# Altium PCB ShutdownDPDT-P01-V02.PcbDoc
Units mil, origin at the board's own origin, x right, y up, seen from the top; angles counter-clockwise.
Board outline 2150 x 2150 mil, 2 copper layers (Top Layer, Bottom Layer); 29 components, 25 nets, 134 pads, 7 vias.
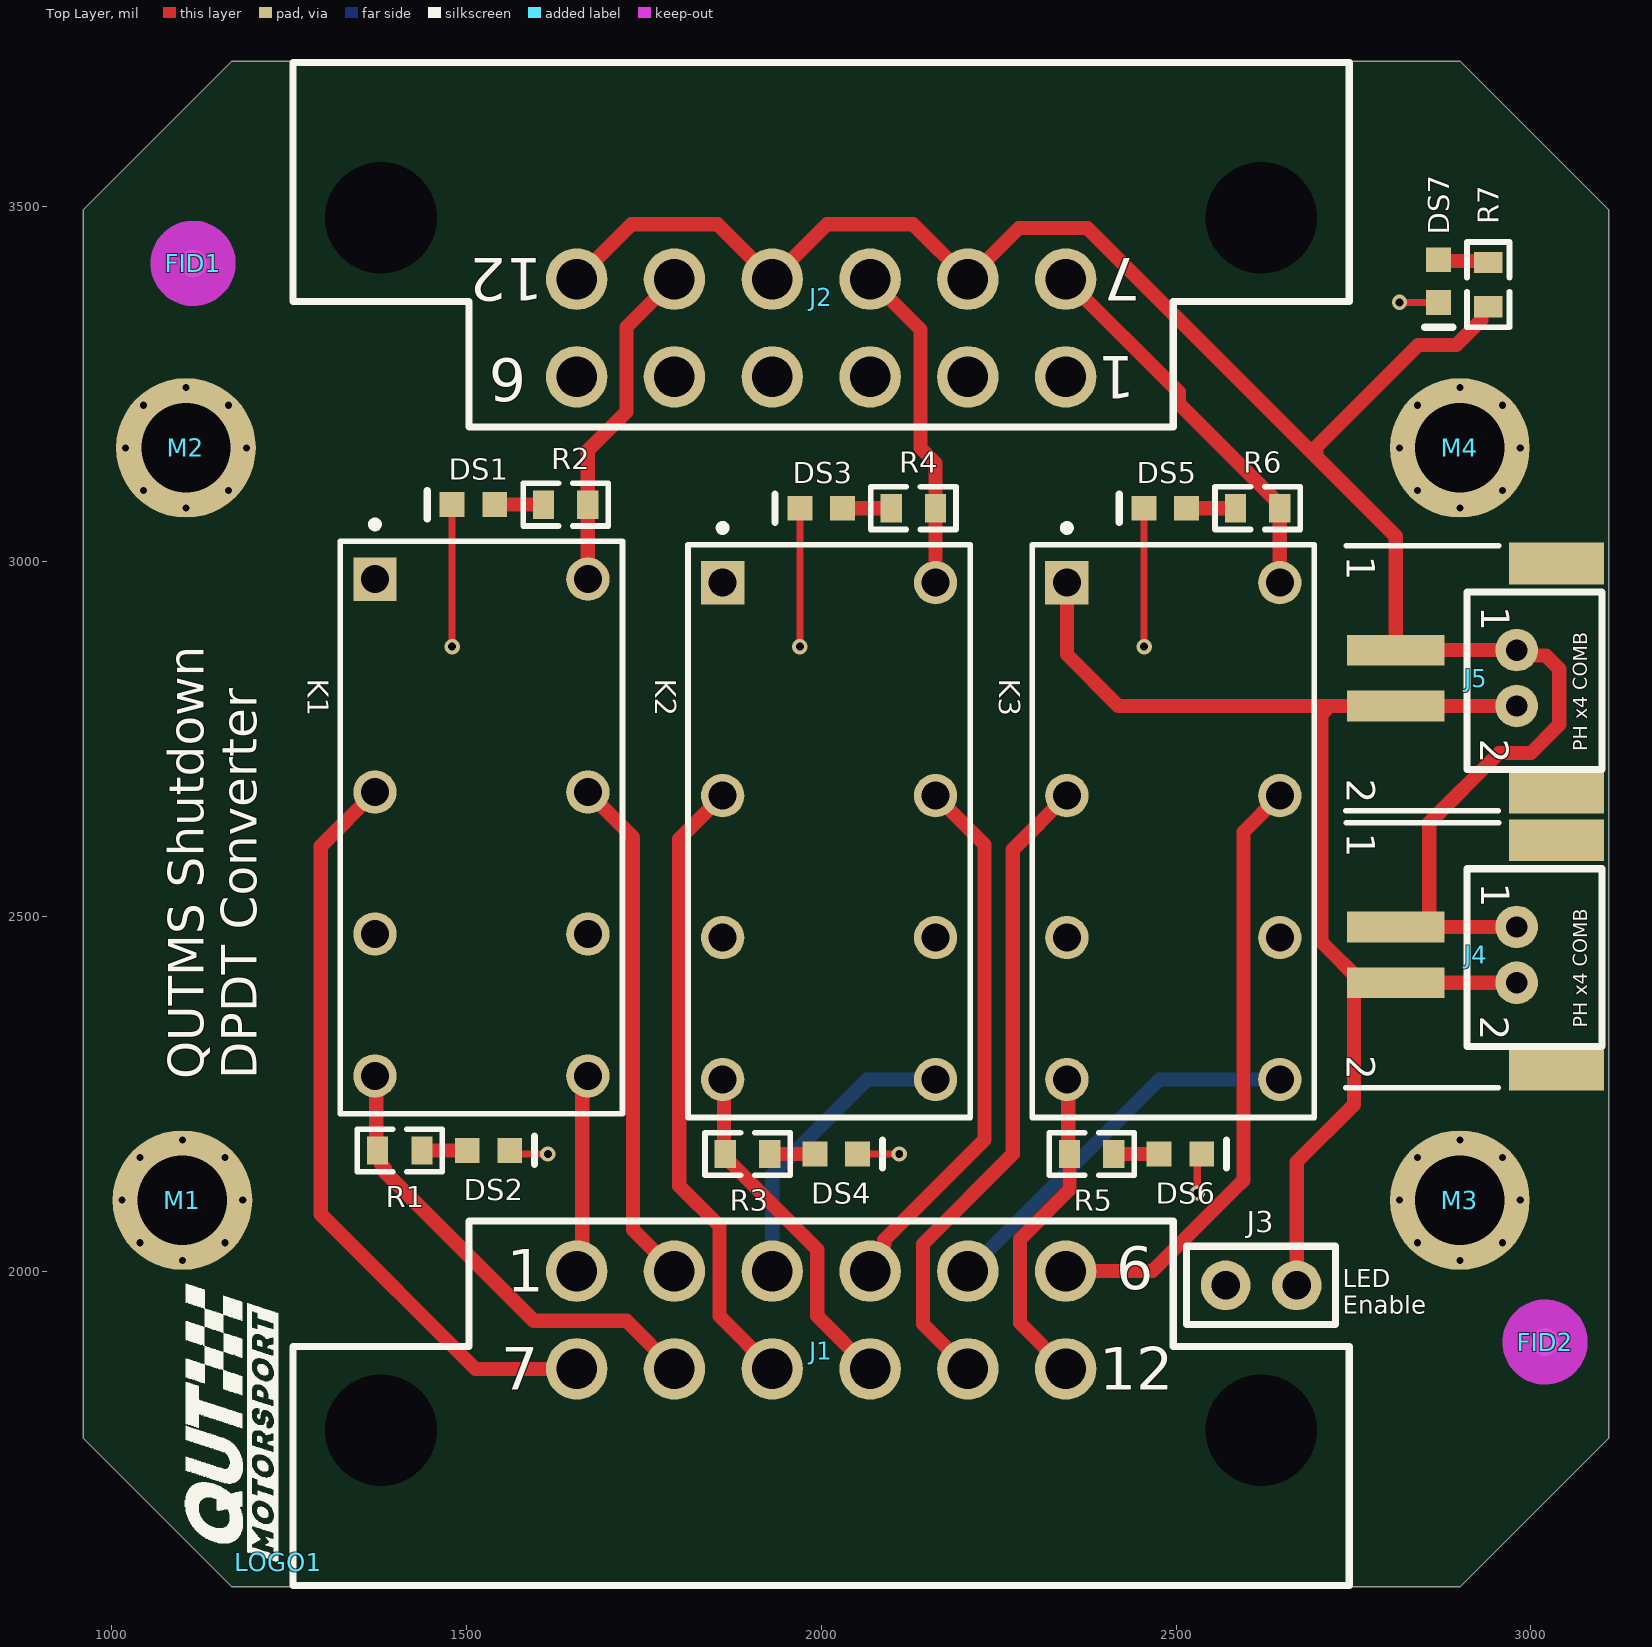
[diagram p0: Top Layer view]
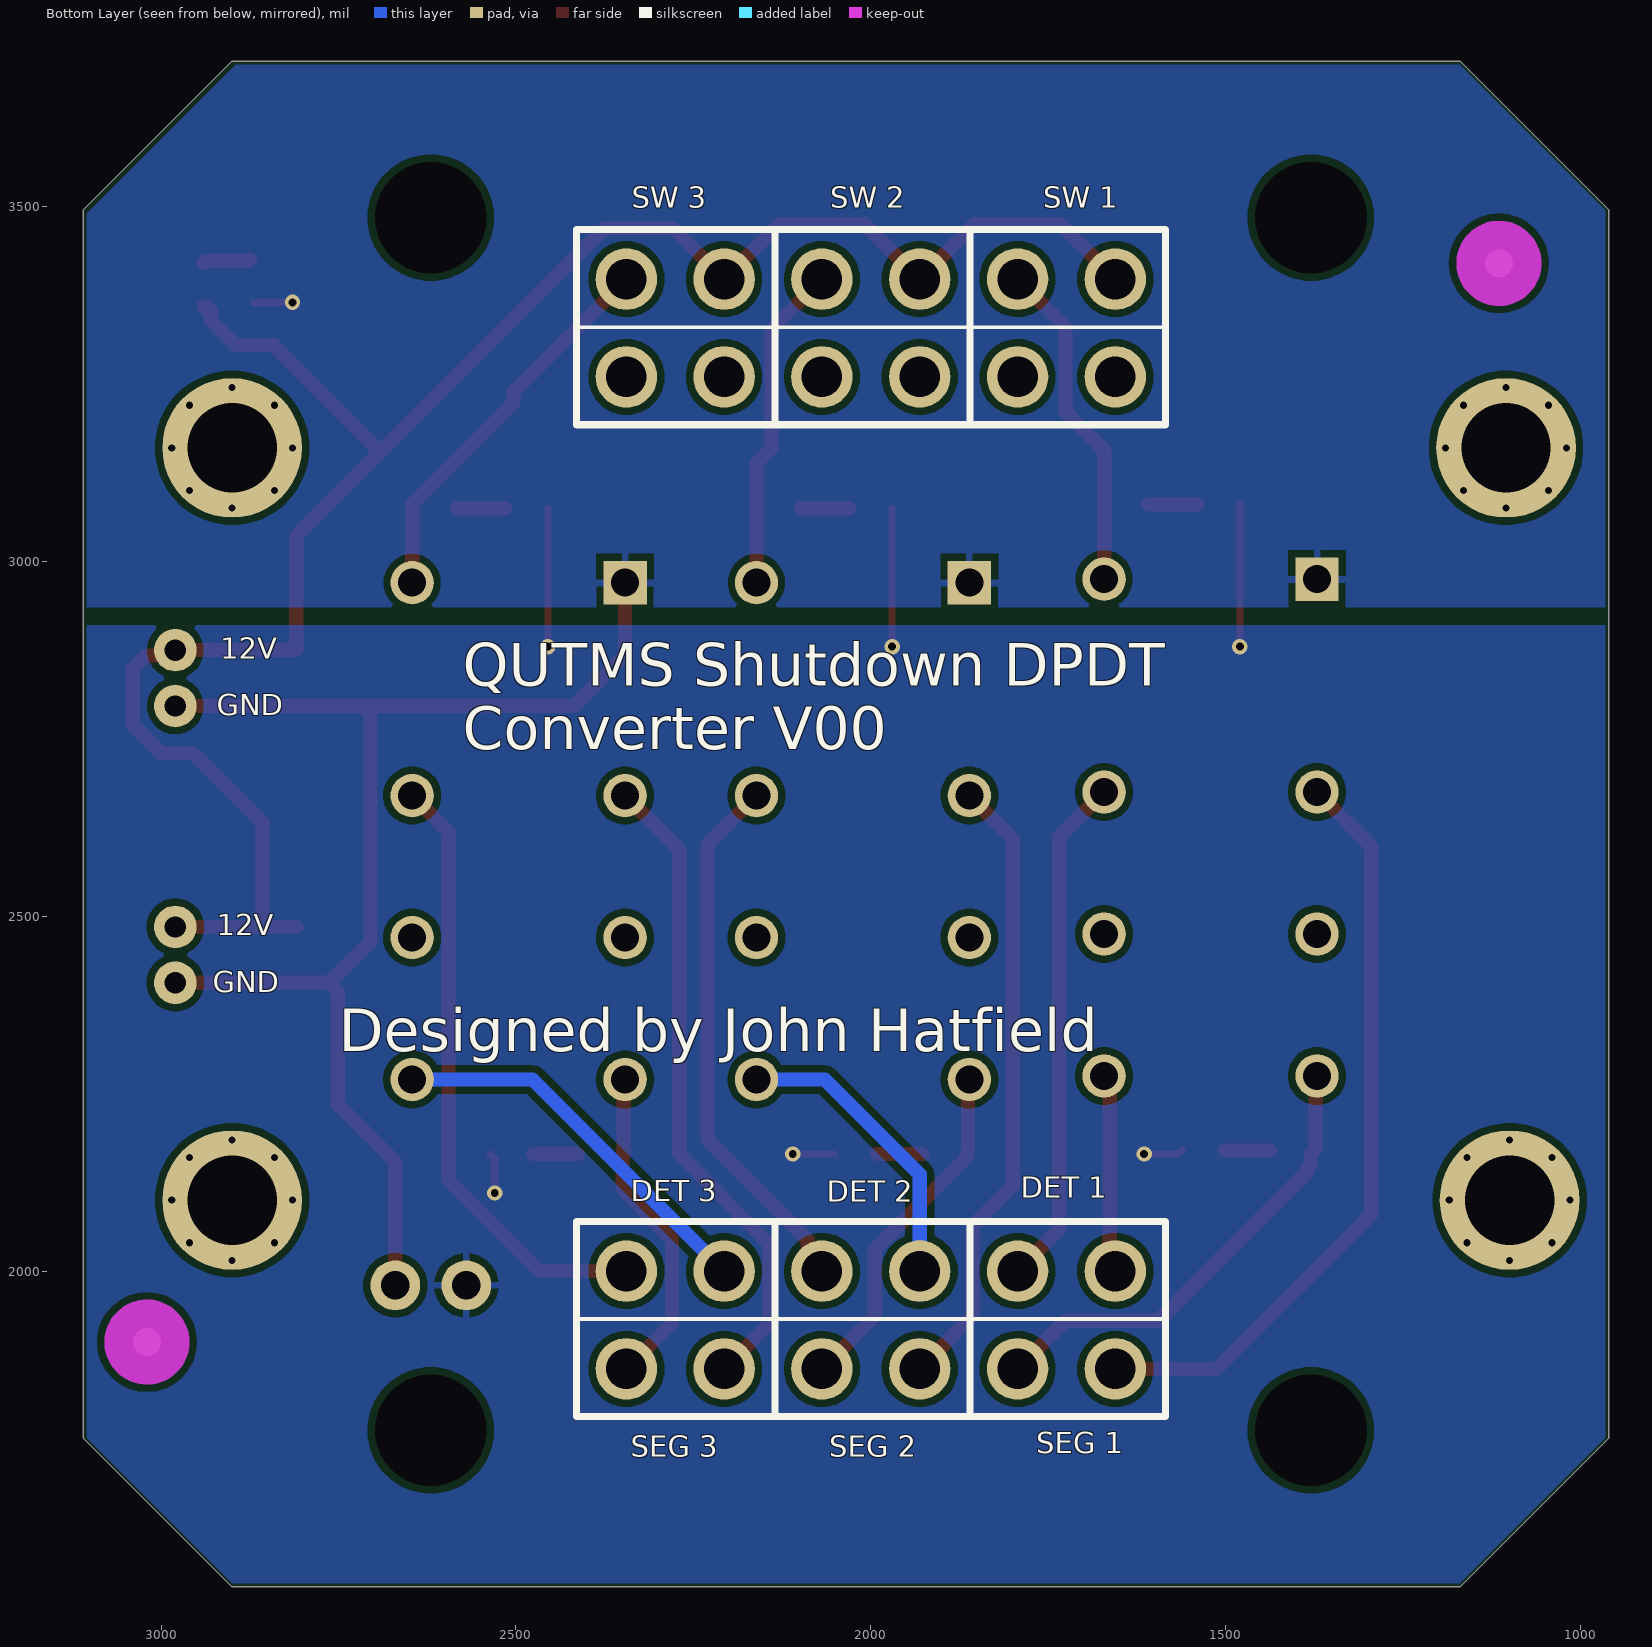
[diagram p1: Bottom Layer view, seen from below]

## Layer stack, top to bottom
Top Solder: solder mask 0.4, Solder Resist, Dk 3.5
Top Layer: signal copper 1.4
Dielectric 1: dielectric 12.6, FR-4, Dk 4.8
Bottom Layer: signal copper 1.4
Bottom Solder: solder mask 0.4, Solder Resist, Dk 3.5

## Board outline
960,1765 960,3495 1170,3705 2900,3705 3110,3495 3110,1765 2900,1555 1170,1555

## Design rules (kind name [scope] priority, off if disabled: settings)
Clearance [All] p1: gap=10 ignorepadtopadclearanceinfootprint=FALSE except(0: Arc-Hole Track-Hole SMDPad-Hole THPad-Hole Via-Hole Fill-Hole Poly-Hole Region-Hole Text-Hole)
PolygonConnect [All] p1: thpad.connectstyle=Relief thpad.reliefconductorwidth=10 thpad.reliefentries=4 thpad.polygonreliefangle="90 Angle" thpad.airgapwidth=10 smdpad.connectstyle=Relief smdpad.reliefconductorwidth=10 smdpad.reliefentries=4 smdpad.polygonreliefangle="90 Angle" smdpad.airgapwidth=10 via.connectstyle=Direct via.reliefconductorwidth=10 via.reliefentries=4 via.polygonreliefangle="90 Angle" via.airgapwidth=10
RoomDefinition DPDT_Relay_11 [InComponentClass('DPDT_Relay_11')] p1: confinementstyle=ConfineIn formatcopy=TRUE lockcomponents=FALSE outline 2235,2075 2710,2075 2710,3180 2235,3180
RoomDefinition ShutdownDPDT-S01-V00 [InComponentClass('ShutdownDPDT-S01-V00')] p2 off: confinementstyle=ConfineIn formatcopy=TRUE lockcomponents=FALSE outline 3214.57,2043.74 3214.57,3370 2744.57,3370 2744.57,2043.74
RoomDefinition RelayGroup [InComponentClass('RelayGroup')] p3 off: confinementstyle=ConfineIn formatcopy=TRUE lockcomponents=FALSE outline 3905,2210 6650,2210 6650,3800 3905,3800
RoomDefinition DPDT_Relay_12 [InComponentClass('DPDT_Relay_12')] p4: confinementstyle=ConfineIn formatcopy=TRUE lockcomponents=FALSE outline 1260,2080 1735,2080 1735,3185 1260,3185
RoomDefinition DPDT_Relay_2 [InComponentClass('DPDT_Relay_2')] p5: confinementstyle=ConfineIn formatcopy=TRUE lockcomponents=FALSE outline 1750,2075 2225,2075 2225,3180 1750,3180
RoutingVias [All] p1: holewidth=28 width=50 viastyle="Through Hole" minholewidth=28 minwidth=50 maxholewidth=28 maxwidth=50
SolderMaskExpansion [All] p1: expansion=4 istentingtop=FALSE
Width [All] p1: maxlimit=20 minlimit=10 preferedwidth=10 minimp=50.000000 maximp=50.000000 favimp=50.000000
30 further rules are at their usual default settings.

## Classes and differential pairs
channel class ShutdownDPDT-S02-V00-Relay: DPDT_Relay_2 DPDT_Relay_11 DPDT_Relay_12
component class ShutdownDPDT-S01-V00: DS7 FID2 J4 J5 LOGO1 M2 M3 M4 R7
component class RelayGroup: J2 J5
component class DPDT_Relay_12: DS1 DS2 K1 R1 R2
component class DPDT_Relay_11: DS5 DS6 K3 R5 R6
component class DPDT_Relay_2: DS4 DS7 K2 R4 R7

## Components (designator, comment, footprint, x,y, rotation, side; value= is the part's Value field where it differs from the comment)
DS1 "LED Red 0603" "LED RED 0603" 1510,3080 r180 top
DS2 "LED Red 0603" "LED RED 0603" 1531.24,2170 r0 top
DS3 "LED Red 0603" "LED RED 0603" 2000,3075 r180 top (schematic designator DS1)
DS4 "LED Red 0603" "LED RED 0603" 2021.24,2165 r0 top (schematic designator DS2)
DS5 "LED Red 0603" "LED RED 0603" 2485,3075 r180 top (schematic designator DS1)
DS6 "LED Red 0603" "LED RED 0603" 2506.24,2165 r0 top (schematic designator DS2)
DS7 "LED Green 0603" "LED GREEN 0603" 2870,3395 r270 top (schematic designator DS3)
FID1 "Fiducial 1MM" "FIDUCIAL 1MM" 1115,3420 r0 top (schematic designator FID2)
FID2 "Fiducial 1MM" "FIDUCIAL 1MM" 3020,1900 r0 top (schematic designator FID1)
J1 "MX120G" MX120G 2000,2000 r0 top (schematic designator J3)
J2 "MX120G" MX120G 2000,3260 r180 top
J3 "Jumper 2Way Pins" Jumper_2Way_Pin 2670,1980 r0 top (schematic designator J5)
J4 "JST PH 2x RIGHT COMB" "JST PH 2x RIGHT COMB" 3095,2366.89 r270 top
J5 "JST PH 2x RIGHT COMB" "JST PH 2x RIGHT COMB" 3095,2756.89 r270 top (schematic designator J1)
K1 "G5V-2-DC12" FP-G5V-2-DC12-MFG 1521.24,2625 r270 top
K2 "G5V-2-DC12" FP-G5V-2-DC12-MFG 2011.24,2620 r270 top (schematic designator K1)
K3 "G5V-2-DC12" FP-G5V-2-DC12-MFG 2496.24,2620 r270 top (schematic designator K1)
LOGO1 "10mm Wide QUTMS Logo" "QUTMS LOGO 10MM" 1235,1590 r90 top
M1 "Hole M3 Tight Plated" "M3.2 PLATED" 1100,2100 r0 top (schematic designator M4)
M2 "Hole M3 Tight Plated" "M3.2 PLATED" 1105,3160 r0 top
M3 "Hole M3 Tight Plated" "M3.2 PLATED" 2900,2100 r0 top
M4 "Hole M3 Tight Plated" "M3.2 PLATED" 2900,3160 r0 top (schematic designator M1)
R1 "1k 5% 0603" Res_ThinFilm_0603 1406.24,2170 r180 top (schematic designator R2)
R2 "1k 5% 0603" Res_ThinFilm_0603 1640,3080 r0 top (schematic designator R1)
R3 "1k 5% 0603" Res_ThinFilm_0603 1896.24,2165 r180 top (schematic designator R2)
R4 "1k 5% 0603" Res_ThinFilm_0603 2130,3075 r0 top (schematic designator R1)
R5 "1k 5% 0603" Res_ThinFilm_0603 2381.24,2165 r180 top (schematic designator R2)
R6 "1k 5% 0603" Res_ThinFilm_0603 2615,3075 r0 top (schematic designator R1)
R7 "10k 1% 0603" Res_ThinFilm_0603 2940,3390 r270 top (schematic designator R3)

## Footprints (in the part's own frame and the unit in brackets; to place one, negate y for a bottom-side part, rotate by r counter-clockwise, add the part's x,y. Pads: shape width x height; smd on the part's side, far side on the other; paste and mask are expansions set on the pad)
"FIDUCIAL 1MM" [mm]
  round 1 smd mask+1: 1(0,0)
  round 1 smd far side mask+1: 1(0,0)
  Keep-Out Layer circle w1.524: c0,0 r0.762
FP-G5V-2-DC12-MFG [mm]
  rect 1.55x1.55 hole 1 paste-1000 mask+0: 1(-8.89,-3.81)
  round 1.55 hole 1 paste-1000 mask+0: 4(-1.27,-3.81) 6(3.81,-3.81) 8(8.89,-3.81) 9(8.89,3.81) 11(3.81,3.81) 13(-1.27,3.81) 16(-8.89,3.81)
  silkscreen extent -10.97,-5.05 10.25,5.05, body extent -10.35,-5.15 10.35,5.15, height 0.25
"JST PH 2x RIGHT COMB" [mm]
  round 1.524 hole 0.762: 1(-3,-2.921) 2(-1,-2.921)
  rect 1.1x3.5 smd: 1(-3,-7.25) 2(-1,-7.25)
  rect 1.5x3.4 smd: M(-6.1,-1.5) M(2.1,-1.5)
  silkscreen extent -6.73,-9.04 2.75,0.13, body extent -6.17,-8.03 1.97,0.23, height 5.89
Jumper_2Way_Pin [mil]
  round 70 hole 40: 1(-100,0) 2(0,0)
  silkscreen extent -155,-55 55,55, body extent -142,-48 42,47, height 332
"LED GREEN 0603" [mil]
  rect 35x35 smd: 1(-30,0) 2(30,0)
  silkscreen extent 65,-20 65,20, body extent -40,-20 40,20, height 30
"LED RED 0603" [mil]
  rect 35x35 smd: 1(-30,0) 2(30,0)
  silkscreen extent 65,-20 65,20, body extent -40,-20 40,20, height 30
"M3.2 PLATED" [mil]
  round 20 hole 10: 1(-85,0) 1(-60,-60) 1(-60,60) 1(0,-85) 1(0,85) 1(60,-60) 1(60,60) 1(85,0)
  round 196.85 hole 125.98: 1(0,0)
MX120G [mm]
  round 2.2 hole 1.45: 1(-8.75,0) 2(-5.25,0) 3(-1.75,0) 4(1.75,0) 5(5.25,0) 6(8.75,0) 7(-8.75,-3.5) 8(-5.25,-3.5) 9(-1.75,-3.5) 10(1.75,-3.5) 11(5.25,-3.5) 12(8.75,-3.5)
  round 0 hole 4 mask+0.254: NC(-15.75,-5.7) NC(15.75,-5.7)
  silkscreen extent -18.9,-11.25 18.9,1.8, body extent -18.78,-32.1 18.58,0.36, height 24.48
"QUTMS LOGO 10MM" [mil]
  silkscreen extent 0,0 392,131
Res_ThinFilm_0603 [mil]
  rect 30x40 smd: 1(-31.24,0) 2(31.24,0)
  silkscreen extent -60,-30 60,30, body extent -31,-16 32,16, height 18

## Part data
J1 J2: "MX120G with standard connector layout"
J3: library part "Jumper 2Way Vert Pins", "Jumper 2Way Vert Pins"
K1 K2 K3: library part CMP-08823-000082-1, "RELAY GEN PURPOSE DPDT 2A 12VDC", Case/Package=DIP, Coil Current=41.7mA, Coil Power=500mW, Coil Resistance=288R, Coil Voltage (DC)=12V, Contact Current Rating=2A, Manufacturer Series=G5V-2, Max Operating Temperature=65°C, Max Voltage Rating (AC)=125V, Min Operating Temperature=-25°C, Package Quantity=25, Approvals=UL, Coil Type=Non-Latching, Contact Material=Gold, Current Rating=2A, Depth=10.1mm, Height=11.5mm, Lead Free="Lead Free", Length=20.5mm, Max Current Rating=2A, Max Voltage Rating (DC)=125V, Mount="Through Hole", Number of Pins=8, Operate Time=7ms, Packaging=Rail/Tube, Power Consumption=500mW, Power Rating=500mW, Radiation Hardening=No, Reference Standard=UL, Relay Action=MOMENTARY, Relay Function=DPDT, Relay Type="General Purpose", Release Time=3ms, Series=G5V-2, Termination="PC Pin", Throw Configuration=DPDT, Type=Electromechanical, Voltage Rating (AC)=125V, Voltage Rating (DC)=125V, Weight=5g, Width=10.1mm
LOGO1: library part "QUTMS Logo 10mm"
M1 M2 M3 M4: "M3.2 Hole, Plated"
R1 R2 R3 R4 R5 R6: "Resistor, SMD, 1k, 0.1W, 5%, 0603"
R7: "Resistor, SMD, 10k, 0.1W, 1%, 0603"

## Via types
v1: diameter 21.65, hole 11, Top Layer to Bottom Layer, 7 vias

## Nets (pads, with @x,y where several pads share a name; then routed paths per layer and width w, separated by ;. In a path a pad name is that pad's centre, name@x,y a point inside that pad or via, vN(x,y) a via of type N, cw(c..) or ccw(c..) an arc to the next point about the centre after c; other vN are vias at no path point)
12V: J2.8 J2.10 J2.12 J4.1 J5.1 R7.2 | length 2875.9
  Top Layer w20: J2.12 1732.72,3475 1853.9,3475 J2.10 2008.31,3475 2129.49,3475 J2.8 2278.9,3470 2375,3470 2690.62,3154.38 2697.5,3147.5 ; J4.1@2809.57,2485 J4.1@2856.81,2485 ; R7.2 2935,3358.76 2930,3353.76 2930,3340 2895,3305 2841.24,3305 2697.5,3161.26 2697.5,3147.5 ; J4.1@2980,2485 2865,2485 J4.1@2856.81,2485 ; 2697.5,3147.5 2809.57,3035.43 2809.57,2875 2980,2875 2987.65,2867.35 3020.94,2867.35 3040,2848.28 3040,2770 3000,2730 2955,2730 2856.81,2631.81 J4.1@2856.81,2485
DET_IN_1: J1.2 K1.13 | length 725.6
  Top Layer w20: K1.13 1735,2611.24 1735,2058.31 J1.2
DET_IN_2: J1.4 K2.13 | length 765.2
  Top Layer w20: J1.4 2068.9,2018.03 2088.78,2037.91 2088.78,2043.78 2230,2185 2230,2601.24 K2.13
DET_IN_3: J1.6 K3.13 | length 866.7
  Top Layer w20: J1.6 2466.91,2000 2583.28,2116.37 2595,2128.09 2595,2618.76 K3.13
DET_OUT_1: J1.1 K1.9 | length 281.5
  Top Layer w20: J1.1 1663.39,2007.87 1663.39,2267.15 K1.9
DET_OUT_2: J1.3 K2.9 | length 421.7
  Bottom Layer w20: J1.3 1931.1,2136.1 2065,2270 K2.9
DET_OUT_3: J1.5 K3.9 | length 551.4
  Bottom Layer w20: J1.5 2476.69,2270 K3.9
GND: DS7.2 J3.2 J4.2 J5.2 K1.1 K2.1 K3.1 | length 1920.8
  Top Layer w10: v1(2815,3365) DS7.2
  Top Layer w20: K3.1 2346.24,2868.76 2418.74,2796.26 2716.72,2796.26 ; J3.2 2670,2153.73 2750.67,2234.4 2750.67,2394.61 J4.2@2762.32,2406.26 ; J4.2@2980,2406.26 2809.57,2406.26 J4.2@2762.32,2406.26 ; J5.2@2980,2796.26 2809.57,2796.26 2716.72,2796.26 ; 2716.72,2796.26 2705,2784.54 2705,2463.58 J4.2@2762.32,2406.26
"LED GND": DS1.2 DS2.2 DS3.2 DS4.2 DS5.2 DS6.2 J3.1 | length 762.2
  Top Layer w10: v1(1480,2880) DS1.2 ; DS2.2 1566.24,2165 v1(1615,2165) ; v1(1970,2880) DS3.2 ; DS4.2 v1(2110,2165) ; v1(2455,2880) DS5.2 ; v1(2530,2110) 2530,2158.76 DS6.2
NetDS1A_1: DS5.1 R6.1 | length 68.8
  Top Layer w20: DS5.1 R6.1
NetDS1B_1: DS1.1 R2.1 | length 68.8
  Top Layer w20: DS1.1 R2.1
NetDS1C_1: DS3.1 R4.1 | length 68.8
  Top Layer w20: DS3.1 R4.1
NetDS2A_1: DS6.1 R5.1 | length 63.8
  Top Layer w20: R5.1 DS6.1
NetDS2B_1: DS2.1 R1.1 | length 63.8
  Top Layer w20: R1.1 DS2.1
NetDS2C_1: DS4.1 R3.1 | length 63.8
  Top Layer w20: R3.1 DS4.1
NetDS3_1: DS7.1 R7.1 | length 66.6
  Top Layer w20: DS7.1@2875,3425 2876.88,3423.12 2938.12,3423.12 R7.1
NetJ2_7: J2.7 K3.16 R6.2 | length 552.8
  Top Layer w20: J2.7 2503.74,3238.54 2503.74,3222.49 2646.24,3080 R6.2 K3.16
NetJ2_9: J2.9 K2.16 R4.2 | length 466
  Top Layer w20: J2.9 2140,3326.69 2140,3160 2161.24,3138.76 R4.2 K2.16
NetJ2_11: J2.11 K1.16 R2.2 | length 473.4
  Top Layer w20: K1.16 R2.2 1671.24,3156.24 1725.9,3210.9 1725.9,3330.39 J2.11
SHDN_IN_1: J1.8 K1.8 R1.2 | length 664.1
  Top Layer w20: K1.8 1373.12,2273.12 1373.12,2171.88 R1.2 1380,2165 1380,2150 1385,2145 1385,2140 1595,1930 1725.51,1930 J1.8
SHDN_IN_2: J1.10 K2.8 R3.2 | length 493.8
  Top Layer w20: K2.8 1863.12,2268.12 1863.12,2166.88 R3.2 1865,2160 1994.41,2030.59 1994.41,1936.69 J1.10
SHDN_IN_3: J1.12 K3.8 R5.2 | length 465.1
  Top Layer w20: J1.12 2280,1926.69 2280,2045 2350,2115 R5.2 2348.12,2166.88 2348.12,2268.12 K3.8
SHDN_OUT_1: J1.7 K1.4 | length 1077.3
  Top Layer w20: K1.4 1295,2598.76 1295,2080 1512.8,1862.2 J1.7
SHDN_OUT_2: J1.9 K2.4 | length 887.5
  Top Layer w20: K2.4 1800,2608.76 1800,2120 1856.61,2063.39 1856.61,1936.69 J1.9
SHDN_OUT_3: J1.11 K3.4 | length 918
  Top Layer w20: J1.11 2143.39,1925.51 2143.39,2038.39 2270,2165 2270,2593.76 K3.4
pads on no net: FID1.1 FID2.1 J1.NC J2.1 J2.2 J2.3 J2.4 J2.5 J2.6 J2.NC J4.M J5.M K1.6 K1.11 K2.6 K2.11 K3.6 K3.11 M1.1 M2.1 M3.1 M4.1

## Polygon pours and split planes (outlines as drawn)
GND on Bottom Layer "GNDP" (solid, pour order 1): 965,3495 1170,3700 2895,3700 3105,3490 3105,2925 965,2925
"LED GND" on Bottom Layer "GNDP" (solid, pour order 0): 965,2910 3105,2910 3105,1765 2900,1560 1170,1560 965,1765

## Silkscreen, mask and mechanical layers (free items; w line width, h text height)
Top Overlay:
  text "QUTMS Shutdown / DPDT Converter" at 1205,2270 h50 r90
  text "LED / Enable" at 2735,1940 h25
Bottom Overlay:
  lines w5: 1585,1932.5 2415,1932.5 ; 1585,3330 2415,3330
  lines w10: 1860,1795 1860,2070 ; 1860,3192.5 1860,3467.5 ; 2135,1795 2135,2070 ; 2135,3192.5 2135,3467.5 ; 1585,1795 2415,1795 2415,2070 1585,2070 1585,1795 ; 1585,3192.5 1585,3467.5 2415,3467.5 2415,3192.5 1585,3192.5
  text "SW 1" at 1757,3498 h30
  text "SW 2" at 2057,3498 h30
  text "SW 3" at 2337,3498 h30
  text "12V" at 2917,2863 h30
  text "GND" at 2922,2783 h30
  text "QUTMS Shutdown DPDT  / Converter V00" at 2574.81,2735 h60
  text "12V" at 2922,2473 h30
  text "GND" at 2927,2393 h30
  text "Designed by John Hatfield" at 2750,2310 h60
  text "DET 1" at 1788.59,2103.37 h30
  text "DET 2" at 2062,2098 h30
  text "DET 3" at 2338.59,2098.37 h30
  text "SEG 1" at 1767,1743 h30
  text "SEG 2" at 2058.59,1738.37 h30
  text "SEG 3" at 2338.59,1738.37 h30
Mechanical 1:
  the board outline again, w10

## Text inside footprints (layer, text, board x,y; h text height)
J1: Top Overlay "1" at 1557.24,1970.63 h60; Top Overlay "7" at 1549.37,1832.83 h60; Top Overlay "6" at 2415.51,1974.57 h60; Top Overlay "12" at 2391.89,1832.83 h60
J2: Top Overlay "1" at 2442.75,3289.37 h60 r180; Top Overlay "7" at 2450.63,3427.17 h60 r180; Top Overlay "6" at 1584.49,3285.43 h60 r180; Top Overlay "12" at 1608.11,3427.17 h60 r180
J4: Top Overlay "2" at 2740.75,2303.82 h40 r270; Top Overlay "1" at 2740.75,2617.8 h40 r270; Top Overlay "PH x4 COMB" at 3079.16,2342.64 h19.68 r90; Top Overlay "2" at 2928.74,2359.92 h40 r270; Top Overlay "1" at 2930,2546.89 h40 r270
J5: Top Overlay "2" at 2740.75,2693.82 h40 r270; Top Overlay "1" at 2740.75,3007.8 h40 r270; Top Overlay "PH x4 COMB" at 3079.16,2732.64 h19.68 r90; Top Overlay "2" at 2928.74,2749.92 h40 r270; Top Overlay "1" at 2930,2936.89 h40 r270